# Altium PCB Probe-Scope v1.0.PcbDoc (part 1 of 2)
Units mil, origin at the board's own origin, x right, y up, seen from the top; angles counter-clockwise.
Board outline 2550 x 850 mil, 6 copper layers (Top Layer, Signal Layer 1, Signal Layer 2, Ground Plane, Power Layer, Bottom Layer), stack 48.468 mil thick; 135 components, 135 nets, 640 pads, 373 vias.
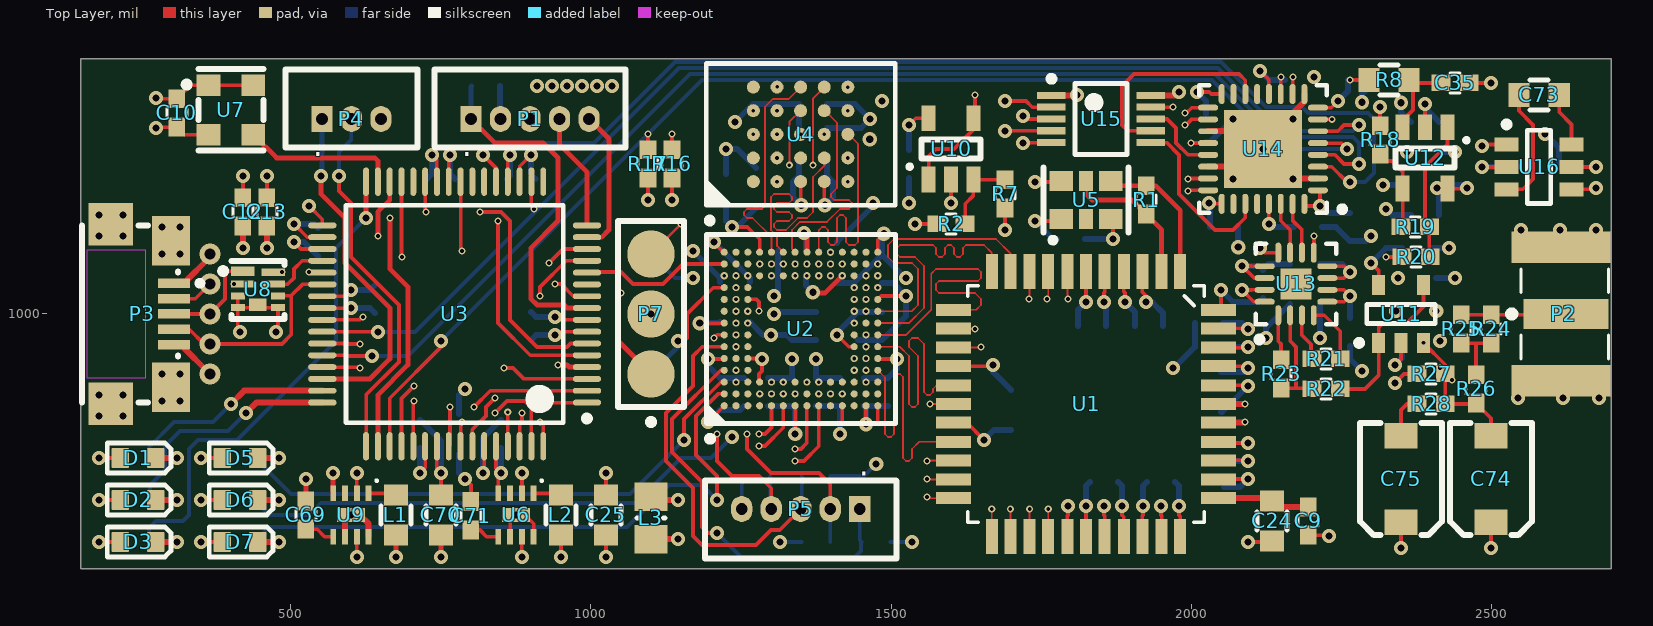
[diagram p0: Top Layer view]
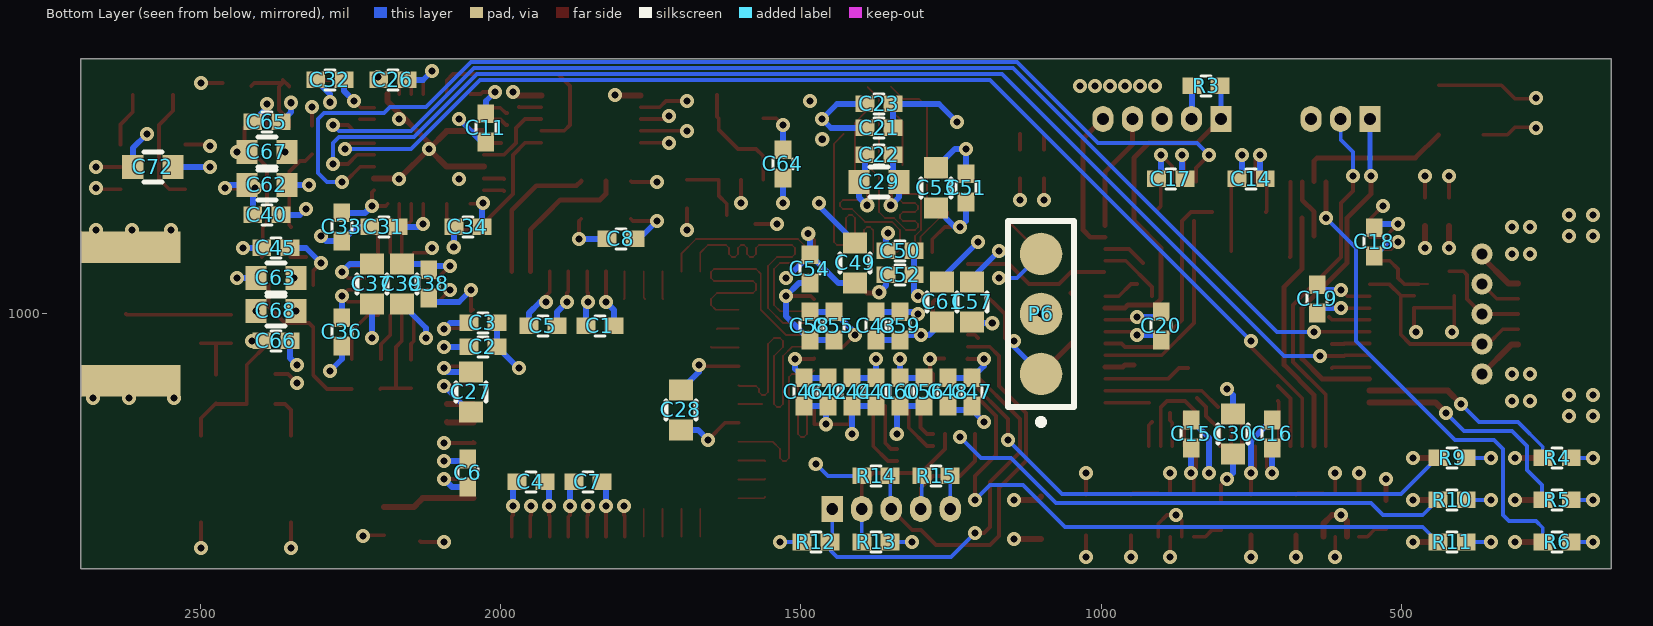
[diagram p1: Bottom Layer view, seen from below]
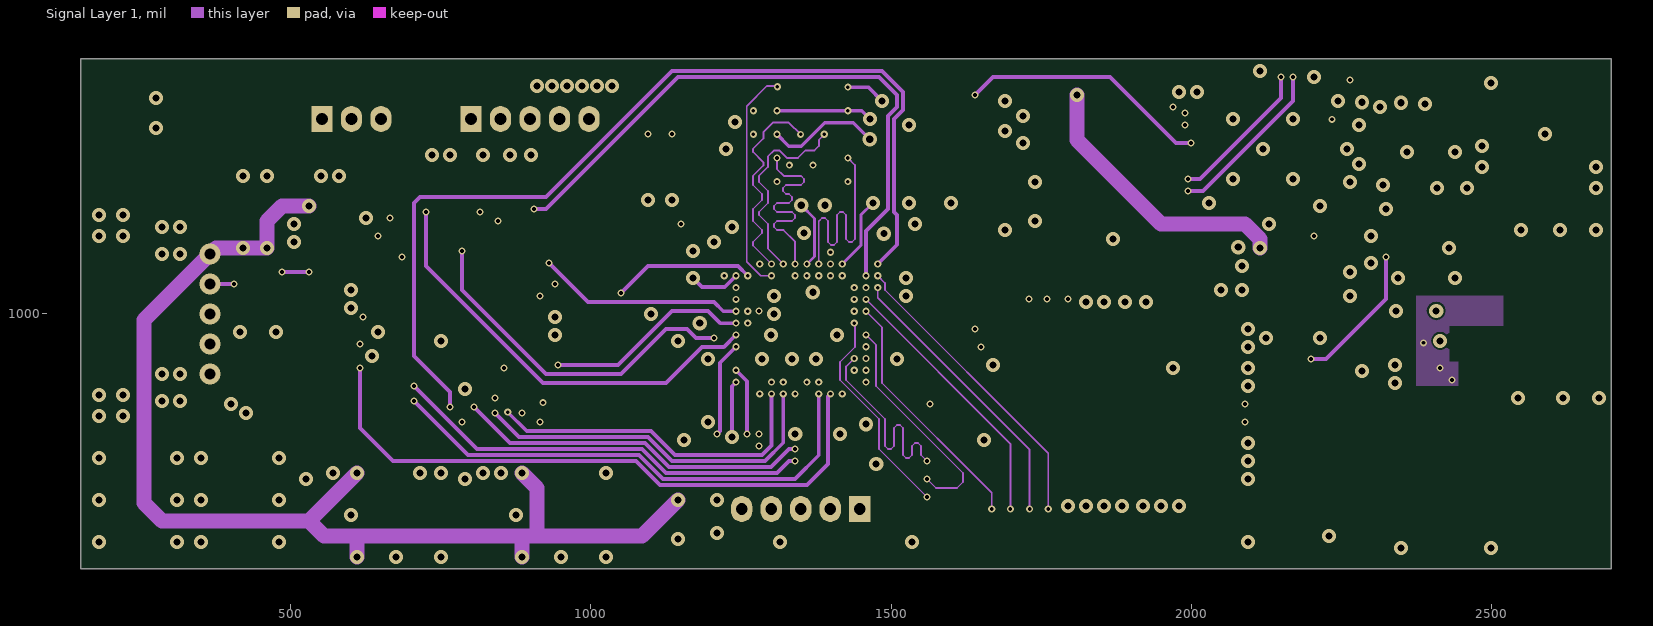
[diagram p2: Signal Layer 1]
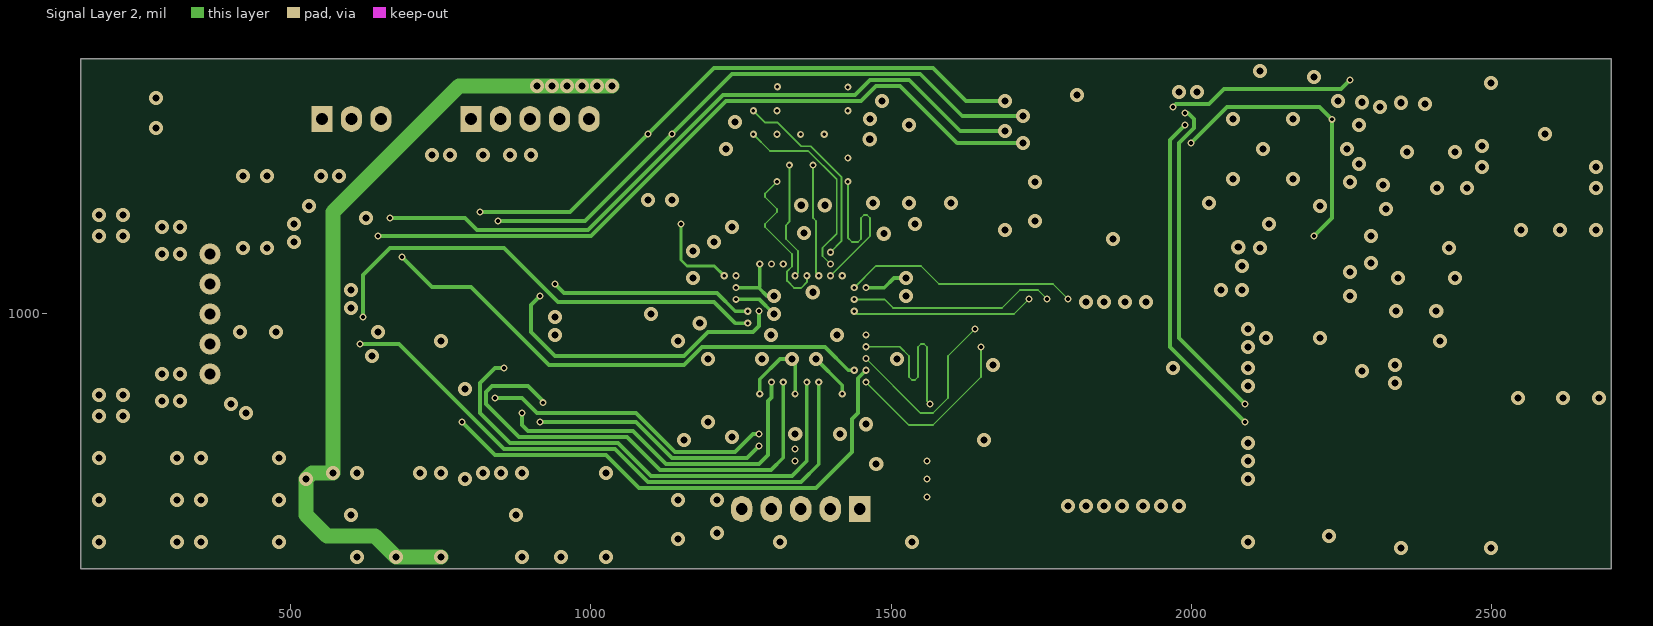
[diagram p3: Signal Layer 2]
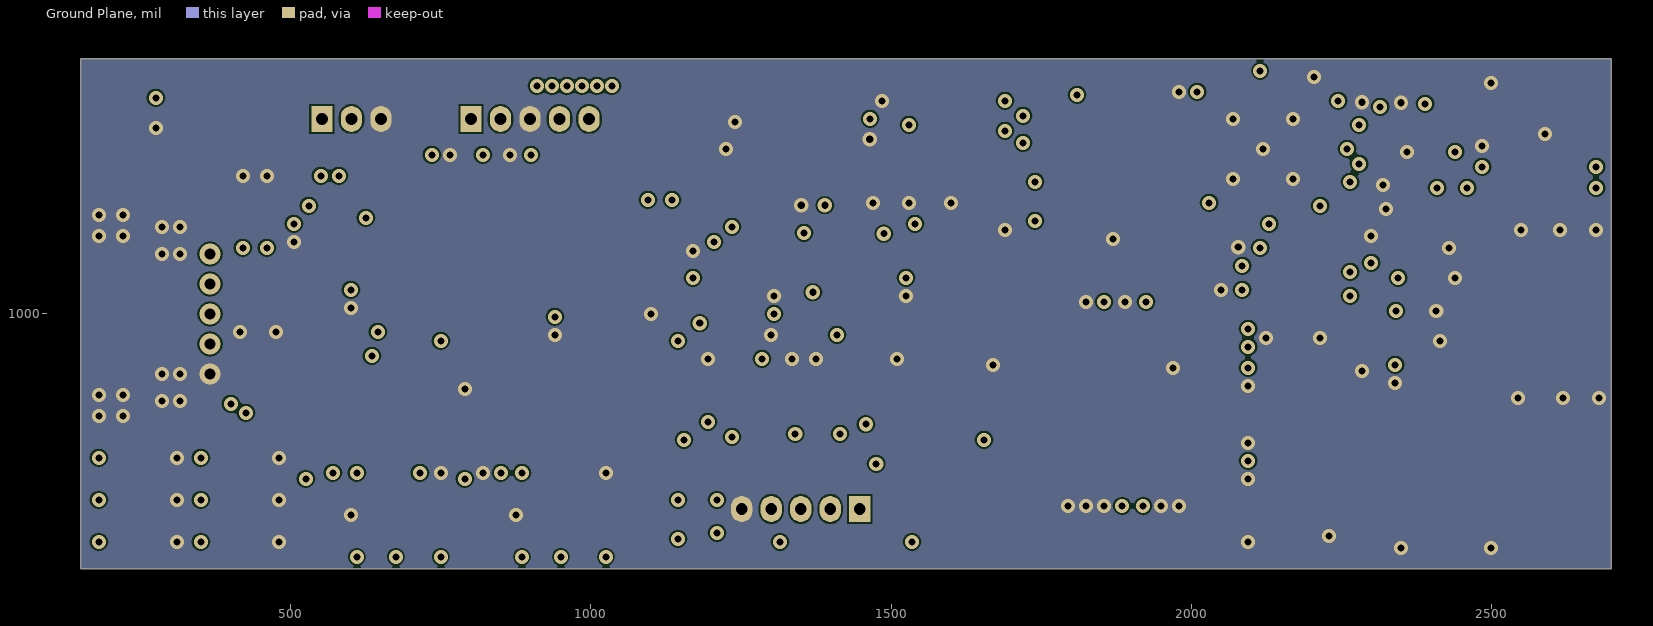
[diagram p4: Ground Plane]
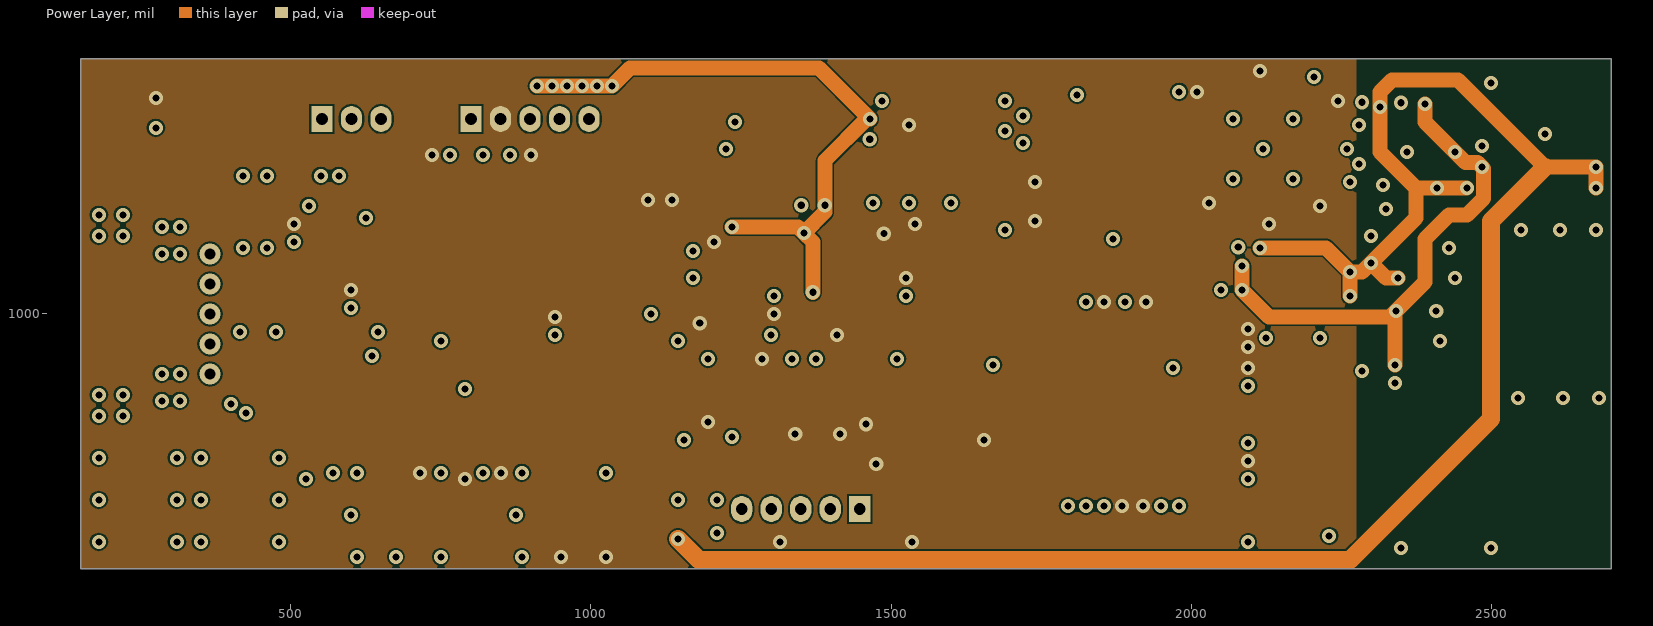
[diagram p5: Power Layer]

## Layer stack, top to bottom
Top Solder: solder mask 0.4, Solder Resist, Dk 3.5
Top Layer: signal copper 1.4
Dielectric 1: core 10, Dk 4.2
Signal Layer 1: signal copper 1.417
Dielectric 3: prepreg 5, FR-4, Dk 4.2
Signal Layer 2: signal copper 1.417
Dielectric 5: core 10, Dk 4.2
Ground Plane: signal copper 1.417
Dielectric 4: prepreg 5, Dk 4.2
Power Layer: signal copper 1.417
Dielectric 2: core 10, Dk 4.2
Bottom Layer: signal copper 1.4
Bottom Solder: solder mask 0.4, Solder Resist, Dk 3.5

## Board outline
150,575 2700,575 2700,1425 150,1425

## Design rules (kind name [scope] priority, off if disabled: settings)
Clearance BGAClearance [All vs HasFootprint('Cypress-VAA024')] p1: gap=3 ignorepadtopadclearanceinfootprint=FALSE
Clearance [All] p2: gap=3 ignorepadtopadclearanceinfootprint=FALSE
DiffPairsRouting [All] p1: maxlimit=10 minlimit=3 mostfreqgap=6 toplayer_minwidth=3 toplayer_maxwidth=15 toplayer_prefwidth=6 midlayer1_minwidth=3 midlayer1_maxwidth=15 midlayer1_prefwidth=6 midlayer2_minwidth=3 midlayer2_maxwidth=15 midlayer2_prefwidth=6 midlayer3_minwidth=3 midlayer3_maxwidth=15 midlayer3_prefwidth=6 midlayer4_minwidth=3 midlayer4_maxwidth=15 midlayer4_prefwidth=6 bottomlayer_minwidth=3 bottomlayer_maxwidth=15 bottomlayer_prefwidth=6 maxuncoupledlength=500
HoleSize [All] p1: absolutevalues=TRUE maxlimit=200 minlimit=6 maxpercent=80.000 minpercent=20.000
HoleToHoleClearance ViaToViaClearance [IsVia vs IsVia] p1: gap=6 allowstackedmicrovias=TRUE
HoleToHoleClearance [All] p2: gap=10 allowstackedmicrovias=TRUE
PlaneClearance [All] p1: clearance=6
PlaneConnect [All] p1: planeconnectstyle=Direct reliefexpansion=20 reliefentries=4 reliefconductorwidth=10 reliefairgap=10
PolygonConnect [All] p1: connectstyle=Direct reliefconductorwidth=10 reliefentries=4 polygonreliefangle="90 Angle" airgapwidth=10
RoutingVias [All] p1: holewidth=12 width=24 viastyle="Through Hole" minholewidth=6 minwidth=12 maxholewidth=28 maxwidth=50
SolderMaskExpansion [All] p1: expansion=4
Width [All] p1: maxlimit=50 minlimit=3 preferedwidth=6 toplayer_maxwidth=10 midlayer1_maxwidth=25 midlayer2_maxwidth=25 midlayer4_maxwidth=10 bottomlayer_maxwidth=10 minimp=50.000000 maximp=50.000000 favimp=50.000000
25 further rules are at their usual default settings.

## Classes and differential pairs
component class Power: C25 C41 C42 C43 C44 C46 C47 C48 C49 C50 C51 C52 C53 C54 C55 C56 C57 C58 C59 C60 C61 C69 C70 C71 C72 C73 L1 L2 L3 PAD1 PAD2 PAD3 PAD4 U6 U9 U16
component class "Sample Memory": C21 C22 C23 C29 U4
component class Controller: C10 C12 C13 C14 C15 C16 C17 C18 C19 C20 C30 D1 D2 D3 D5 D6 D7 P1 P3 P4 P5 P6 P7 P? R3 R4 R5 R6 R9 R10 R11 R12 R13 R14 R15 R16 R17 U3 U7 U8
component class "Analog Frontend": C11 C26 C31 C32 C33 C34 C35 C36 C37 C38 C39 C40 C45 C62 C63 C64 C65 C66 C67 C68 C74 C75 C? P2 P? R2 R7 R8 R18 R19 R20 R21 R22 R23 R24 R25 R26 R27 R28 R? TP? U10 U11 U12 U13 U14 U15 U? VCM?
component class ADC: C1 C2 C3 C4 C5 C6 C7 C8 C9 C24 C27 C28 R1 U1 U2 U5
net class "ADC_DATA - 150mil": ADC_D0A ADC_D0B ADC_D1A ADC_D1B ADC_D2A ADC_D2B ADC_D3A ADC_D3B ADC_D4A ADC_D4B ADC_D5A ADC_D5B ADC_D6A ADC_D6B ADC_D7A ADC_D7B ADC_DCO_N ADC_DCO_P
net class "ADC_CLK - 37.5mil": ADC_D1B ADC_DCO_N ADC_DCO_P
net class "ADC_OSC - 37.5mil": ADC_OSC_N ADC_OSC_P
net class "MEMDDR - 150mil": MEM_C\S\ MEM_CK_N MEM_CK_P MEM_D0 MEM_D1 MEM_D2 MEM_D3 MEM_D4 MEM_D5 MEM_D6 MEM_D7 MEM_PSC_N MEM_PSC_P MEM_R\E\S\E\T\ MEM_RWDS
differential pair Vin: +Vin_P -Vin_N
differential pair FDIO1: +FDIO1_P -FDIO1_N
differential pair FDIO0: +FDIO0_P -FDIO0_N
differential pair ADC_DCO: +ADC_DCO_P -ADC_DCO_N
differential pair ADC_OSC: +ADC_OSC_P -ADC_OSC_N

## Components (designator, comment, footprint, x,y, rotation, side; value= is the part's Value field where it differs from the comment)
C1 "6.3V" 0402(1005) 1835,980 r0 bottom value=0.1uF
C2 "6.3V" 0402(1005) 2030,945 r0 bottom value=0.1uF
C3 "6.3V" 0402(1005) 2030,985 r0 bottom value=0.1uF
C4 "6.3V" 0402(1005) 1950,720 r180 bottom value=0.1uF
C5 "6.3V" 0402(1005) 1930,980 r0 bottom value=0.1uF
C6 "6.3V" 0402(1005) 2055,735 r90 bottom value=0.1uF
C7 "6.3V" 0402(1005) 1855,720 r0 bottom value=0.1uF
C8 "6.3V" 0402(1005) 1800,1125 r180 bottom value=0.1uF
C9 "6.3V" 0402(1005) 2195,655 r90 top value=0.1uF
C10 "6.3V" 0402(1005) 310,1335 r90 top value=0.1uF
C11 "6.3V" 0402(1005) 2025,1310 r90 bottom value=0.1uF
C12 "10V" 0402(1005) 420,1170 r270 top value=1uF
C13 "6.3V" 0402(1005) 460,1170 r270 top value=0.1uF
C14 "6.3V" 0402(1005) 750,1225 r180 bottom value=0.1uF
C15 "6.3V" 0402(1005) 850,800 r270 bottom value=0.1uF
C16 "6.3V" 0402(1005) 715,800 r270 bottom value=0.1uF
C17 "6.3V" 0402(1005) 883.62,1225 r0 bottom value=0.1uF
C18 "6.3V" 0402(1005) 545,1120 r90 bottom value=0.1uF
C19 "6.3V" 0402(1005) 640,1025 r90 bottom value=0.1uF
C20 "6.3V" 0402(1005) 900,980 r90 bottom value=0.1uF
C21 "6.3V" 0402(1005) 1370,1310 r0 bottom value=0.1uF
C22 "6.3V" 0402(1005) 1370,1265 r0 bottom value=0.1uF
C23 "6.3V" 0402(1005) 1370,1350 r0 bottom value=0.1uF
C24 "25V" 0603(1608) 2135,655 r90 top value=10uF
C25 "25V" 0603(1608) 1025,665 r270 top value=10uF
C26 "6.3V" 0402(1005) 2180,1390 r180 bottom value=0.1uF
C27 "25V" 0603(1608) 2050,870 r90 bottom value=10uF
C28 "25V" 0603(1608) 1700,840 r270 bottom value=10uF
C29 "25V" 0603(1608) 1370,1220 r0 bottom value=10uF
C30 "25V" 0603(1608) 780,800 r270 bottom value=10uF
C31 "6.3V" 0402(1005) 2195,1145 r180 bottom value=0.1uF
C32 "6.3V" 0402(1005) 2285,1390 r180 bottom value=0.1uF
C33 "6.3V" 0402(1005) 2265,1145 r90 bottom value=0.1uF
C34 "6.3V" 0402(1005) 2055,1145 r180 bottom value=0.1uF
C35 "6.3V" 0402(1005) 2440,1385 r180 top value=0.1uF
C36 "6.3V" 0402(1005) 2265,970 r90 bottom value=0.1uF
C37 "25V" 0603(1608) 2215,1050 r90 bottom value=10uF
C38 "6.3V" 0402(1005) 2120,1050 r90 bottom value=0.1uF
C39 "25V" 0603(1608) 2165,1050 r90 bottom value=10uF
C40 "6.3V" 0402(1005) 2390,1165 r0 bottom value=0.1uF
C41 "6.3V" 0402(1005) 1375,870 r270 bottom value=0.1uF
C42 "6.3V" 0402(1005) 1455,870 r270 bottom value=0.1uF
C43 "6.3V" 0402(1005) 1375,980 r90 bottom value=0.1uF
C44 "6.3V" 0402(1005) 1415,870 r270 bottom value=0.1uF
C45 "6.3V" 0402(1005) 2375,1110 r180 bottom value=0.1uF
C46 "6.3V" 0402(1005) 1495,870 r270 bottom value=0.1uF
C47 "6.3V" 0402(1005) 1215,870 r270 bottom value=0.1uF
C48 "6.3V" 0402(1005) 1255,870 r270 bottom value=0.1uF
C49 "25V" 0603(1608) 1410,1085 r270 bottom value=10uF
C50 "6.3V" 0402(1005) 1335,1105 r0 bottom value=0.1uF
C51 "6.3V" 0402(1005) 1225,1210 r270 bottom value=0.1uF
C52 "6.3V" 0402(1005) 1335,1065 r0 bottom value=0.1uF
C53 "25V" 0603(1608) 1275,1210 r270 bottom value=10uF
C54 "6.3V" 0402(1005) 1485,1075 r90 bottom value=0.1uF
C55 "6.3V" 0402(1005) 1445,980 r90 bottom value=0.1uF
C56 "6.3V" 0402(1005) 1295,870 r270 bottom value=0.1uF
C57 "25V" 0603(1608) 1215,1020 r270 bottom value=10uF
C58 "6.3V" 0402(1005) 1485,980 r90 bottom value=0.1uF
C59 "6.3V" 0402(1005) 1335,980 r90 bottom value=0.1uF
C60 "6.3V" 0402(1005) 1335,870 r270 bottom value=0.1uF
C61 "25V" 0603(1608) 1265,1020 r90 bottom value=10uF
C62 "25V" 0603(1608) 2390,1215 r0 bottom value=10uF
C63 "25V" 0603(1608) 2375,1060 r180 bottom value=10uF
C64 "6.3V" 0402(1005) 1530,1250 r90 bottom value=0.1uF
C65 "6.3V" 0402(1005) 2390,1320 r0 bottom value=0.1uF
C66 "6.3V" 0402(1005) 2375,955 r180 bottom value=0.1uF
C67 "25V" 0603(1608) 2390,1270 r0 bottom value=10uF
C68 "25V" 0603(1608) 2375,1005 r180 bottom value=10uF
C69 "Cap" 0402(1005) 525,665 r90 top value=560p
C70 "25V" 0603(1608) 750,665 r270 top value=10uF
C71 "Cap" 0402(1005) 800,663.62 r90 top value=560p
C72 "25V" 0603(1608) 2580,1245 r180 bottom value=10uF
C73 "25V" 0603(1608) 2580,1365 r0 top value=10uF
C74 "SGC3S" SGC3S 2500,725 r180 top
C75 "SGC3S" SGC3S 2350,725 r180 top
D1 "Green" "0603(1608) LED" 245,760 r0 top
D2 "Green" "0603(1608) LED" 245,690 r0 top
D3 "Green" "0603(1608) LED" 245,620 r0 top
D5 "Green" "0603(1608) LED" 415,760 r0 top
D6 "Green" "0603(1608) LED" 415,690 r0 top
D7 "Green" "0603(1608) LED" 415,620 r0 top
L1 "Inductor" 0603(1608) 675,665 r270 top value=1u
L2 "Inductor" 0603(1608) 950,665 r270 top value=1u
L3 "Ferrite Bead Y" 0805(2012) 1100,660 r270 top
P1 "ICSP" "MOLEX PICOBLADE 5 POS" 923.03,1325 r180 top
P2 "SMA-J-P-H-ST-EM1" *SMA-J-P-H-ST-EM1_SMA-J-P-H-ST-EM1(Primary) 2625,1000 r90 top
P3 "Micro USB" "USB Micro B ZX62" 305,1000 r270 top
P4 "PicoBlade 3" "MOLEX PICOBLADE 3 POS" 600.79,1325 r180 top
P5 "PicoBlade 5" "MOLEX PICOBLADE 5 POS" 1325,675 r0 top
P6 "Pogo Pads" POGO_PADS_3 1100,1000 r90 bottom
P7 "Pogo Pins" POGO_PINS_3 1100,1000 r90 top
R1 "Res1" 0402(1005) 1925,1190 r270 top value=100
R2 "0.1% 25ppm" 0402(1005) 1600,1150 r180 top value=10k
R3 "0.1% 25ppm" 0402(1005) 825,1380 r0 bottom value=10k
R4 "Res1" 0402(1005) 240,760 r180 bottom value=100
R5 "Res1" 0402(1005) 240,690 r180 bottom value=100
R6 "Res1" 0402(1005) 240,620 r180 bottom value=100
R7 "0.1% 25ppm" 0402(1005) 1690,1200 r90 top value=10k
R8 "Res1" 0603(1608) 2330,1390 r0 top value=16.9k
R9 "Res1" 0402(1005) 415,760 r0 bottom value=100
R10 "Res1" 0402(1005) 415,690 r0 bottom value=100
R11 "Res1" 0402(1005) 415,620 r0 bottom value=100
R12 "Res1" 0402(1005) 1475,620 r0 bottom value=4.99k
R13 "Res1" 0402(1005) 1375,620 r180 bottom value=4.99k
R14 "Res1" 0402(1005) 1375,730 r0 bottom value=4.99k
R15 "Res1" 0402(1005) 1275,730 r0 bottom value=4.99k
R16 "Res1" 0402(1005) 1135,1250 r270 top value=2.32k
R17 "Res1" 0402(1005) 1095,1250 r270 top value=2.32k
R18 "1k" 0402(1005) 2315,1290 r270 top
R19 "1k" 0402(1005) 2373.62,1145 r0 top
R20 "1k" 0402(1005) 2375,1095 r180 top
R21 "1k" 0402(1005) 2225,925 r0 top
R22 "1k" 0402(1005) 2225,875 r180 top
R23 "1k" 0402(1005) 2150,900 r90 top
R24 "Res1" 0402(1005) 2500,975 r90 top value=10M
R25 "Res1" 0402(1005) 2450,975 r90 top value=680k
R26 "Res1" 0402(1005) 2475,875 r90 top value=330k
R27 "Res1" 0402(1005) 2400,900 r0 top value=28k
R28 "Res1" 0402(1005) 2400,850 r0 top value=28k
U1 "AD9481BSUZ-250" QFP80P1200X1200X120-44N 1825,850 r270 top locked
U2 "LCMXO2-4000" 132_Ball_csBGA_MachXO2 1350,975 r90 top locked
U3 "PIC32MZ2048EFH064" TSQFP50P1200X1200X120-64L 772.8,1000 r180 top locked
U4 "S70KS128" Cypress-VAA024 1349.37,1299.37 r90 top locked
U5 "DSC1103" MCHP_H5A 1825,1190 r0 top
U6 "MIC23050_3V" MCP_8_MLF 875,665 r270 top
U7 "24MHz XO" DSC60xxC 400,1340 r0 top
U8 "EMI2121" EMI2121 445,1040 r270 top
U9 "MIC23050_1V8" MCP_8_MLF 600,665 r270 top
U10 "MCP6H01" SOT23-5 1600,1275 r90 top
U11 "AD8055" SOT95P280X145-5L 2350,1000 r90 top
U12 "MCP6H01" SOT23-5 2390,1260 r270 top
U13 "ADA4932-1" QFN50P300X300X80_HS-17L 2175,1050 r90 top
U14 "ADRF6518" QFN50P500X500X80_HS-33L 2120,1275 r180 top
U15 "MCP4728" MSOP-10 1850,1325 r0 top
U16 "LM2664" SOT95P280X145-6N 2580,1245 r0 top

## Footprints (in the part's own frame and the unit in brackets; to place one, negate y for a bottom-side part, rotate by r counter-clockwise, add the part's x,y. Pads: shape width x height; smd on the part's side, far side on the other; paste and mask are expansions set on the pad)
132_Ball_csBGA_MachXO2 [mm] "BGA, 132-Leads, Body 8.00x8.00mmx1.35mm, Pitch 0.50mm"
  round 0.3 smd mask-0.025: A1(-3.25,3.25) A2(-2.75,3.25) A3(-2.25,3.25) A4(-1.75,3.25) A5(-1.25,3.25) A6(-0.75,3.25) A7(-0.25,3.25) A8(0.25,3.25) A9(0.75,3.25) A10(1.25,3.25) A11(1.75,3.25) A12(2.25,3.25) A13(2.75,3.25) A14(3.25,3.25) B1(-3.25,2.75) B2(-2.75,2.75) B3(-2.25,2.75) B4(-1.75,2.75) B5(-1.25,2.75) B6(-0.75,2.75) B7(-0.25,2.75) B8(0.25,2.75) B9(0.75,2.75) B10(1.25,2.75) B11(1.75,2.75) B12(2.25,2.75) B13(2.75,2.75) B14(3.25,2.75) C1(-3.25,2.25) C2(-2.75,2.25) C3(-2.25,2.25) C4(-1.75,2.25) C5(-1.25,2.25) C6(-0.75,2.25) C7(-0.25,2.25) C8(0.25,2.25) C9(0.75,2.25) C10(1.25,2.25) C11(1.75,2.25) C12(2.25,2.25) C13(2.75,2.25) C14(3.25,2.25) D1(-3.25,1.75) D2(-2.75,1.75) D3(-2.25,1.75) D12(2.25,1.75) D13(2.75,1.75) D14(3.25,1.75) E1(-3.25,1.25) E2(-2.75,1.25) E3(-2.25,1.25) E12(2.25,1.25) E13(2.75,1.25) E14(3.25,1.25) F1(-3.25,0.75) F2(-2.75,0.75) F3(-2.25,0.75) F12(2.25,0.75) F13(2.75,0.75) F14(3.25,0.75) G1(-3.25,0.25) G2(-2.75,0.25) G3(-2.25,0.25) G12(2.25,0.25) G13(2.75,0.25) G14(3.25,0.25) H1(-3.25,-0.25) H2(-2.75,-0.25) H3(-2.25,-0.25) H12(2.25,-0.25) H13(2.75,-0.25) H14(3.25,-0.25) J1(-3.25,-0.75) J2(-2.75,-0.75) J3(-2.25,-0.75) J12(2.25,-0.75) J13(2.75,-0.75) J14(3.25,-0.75) K1(-3.25,-1.25) K2(-2.75,-1.25) K3(-2.25,-1.25) K12(2.25,-1.25) K13(2.75,-1.25) K14(3.25,-1.25) L1(-3.25,-1.75) L2(-2.75,-1.75) L3(-2.25,-1.75) L12(2.25,-1.75) L13(2.75,-1.75) L14(3.25,-1.75) M1(-3.25,-2.25) M2(-2.75,-2.25) M3(-2.25,-2.25) M4(-1.75,-2.25) M5(-1.25,-2.25) M6(-0.75,-2.25) M7(-0.25,-2.25) M8(0.25,-2.25) M9(0.75,-2.25) M10(1.25,-2.25) M11(1.75,-2.25) M12(2.25,-2.25) M13(2.75,-2.25) M14(3.25,-2.25) N1(-3.25,-2.75) N2(-2.75,-2.75) N3(-2.25,-2.75) N4(-1.75,-2.75) N5(-1.25,-2.75) N6(-0.75,-2.75) N7(-0.25,-2.75) N8(0.25,-2.75) N9(0.75,-2.75) N10(1.25,-2.75) N11(1.75,-2.75) N12(2.25,-2.75) N13(2.75,-2.75) N14(3.25,-2.75) P1(-3.25,-3.25) P2(-2.75,-3.25) P3(-2.25,-3.25) P4(-1.75,-3.25) P5(-1.25,-3.25) P6(-0.75,-3.25) P7(-0.25,-3.25) P8(0.25,-3.25) P9(0.75,-3.25) P10(1.25,-3.25) P11(1.75,-3.25) P12(2.25,-3.25) P13(2.75,-3.25) P14(3.25,-3.25)
  silkscreen extent -4.77,-4 4,4, body extent -4,-4 4,4, height 1.35
0402(1005) [mm] "Chip, Body 1.1x0.5mm, IPC Medium Density"
  rect 0.8x0.7 smd: 1(-0.6,0) 2(0.6,0)
  silkscreen extent -0.2,-0.43 0.2,0.43, body extent -0.55,-0.3 0.55,0.3, height 0.4
0603(1608) [mm] "Chip, Body 1.6x0.8mm, IPC Medium Density"
  rect 0.9x1 smd: 1(-0.85,0) 2(0.85,0)
  silkscreen extent -0.38,-0.64 0.38,0.63, body extent -0.85,-0.48 0.85,0.47, height 0.6
"0603(1608) LED" [mm] "0603 LED"
  rrect15% 0.75x0.85 smd: 1(-0.75,0) 2(0.75,0)
  silkscreen extent -1.3,-0.64 1.4,0.64, body extent -0.8,-0.4 0.8,0.4, height 0.5
0805(2012) [mm] "Chip, Body 2.0x1.3mm, IPC Medium Density"
  rect 1.2x1.4 smd: 1(-0.9,0) 2(0.9,0)
  silkscreen extent 0,-0.6 0,0.6, body extent -1.02,-0.64 1.02,0.64, height 0.51
*SMA-J-P-H-ST-EM1_SMA-J-P-H-ST-EM1(Primary) [mm]
  rect 1.27x3.6 smd: 1(0,0)
  rect 1.35x4.2 smd: 2(-2.825,0.2) 2(2.825,0.2)
  rect 1.35x4.2 smd far side: 2(-2.825,0.2) 2(2.825,0.2)
  silkscreen extent -1.9,-1.8 1.9,2.44, body extent -3.2,-11.44 3.15,1.89, height 3.77
Cypress-VAA024 [mm]
  round 0.55 smd mask-0.1: A1(-2,2) A2(-1,2) A3(0,2) A4(1,2) A5(2,2) B1(-2,1) B2(-1,1) B3(0,1) B4(1,1) B5(2,1) C1(-2,0) C2(-1,0) C3(0,0) C4(1,0) C5(2,0) D1(-2,-1) D2(-1,-1) D3(0,-1) D4(1,-1) D5(2,-1) E1(-2,-2) E2(-1,-2) E3(0,-2) E4(1,-2) E5(2,-2)
  silkscreen extent -3.77,-4 3,4, body extent -3,-4 3,4, height 1
DSC60xxC [mm] "Microchip DSC60xxCxxx-xxx.xxxx MEMS Oscillator, DFN-4"
  rect 1x0.9 smd: 1(-0.95,1.05) 2(-0.95,-1.05) 3(0.95,-1.05) 4(0.95,1.05)
  silkscreen extent -2,-1.73 1.38,1.73, body extent -1.25,-1.6 1.25,1.6, height 0.85
EMI2121 [mm] "ON Semi EMI2121 USB EMI Filter"
  rect 0.54x0.742 smd mask+0.075: 0(0.63,0)
  rect 0.4x1 smd mask+0.08: 1(-0.8,-0.65)
  rect 0.3x1 smd mask+0.08: 2(-0.25,-0.65) 7(-0.25,0.65) 8(-0.75,0.65)
  rect 0.3x0.6 smd mask+0.075: 3(0.25,-0.85) 4(0.75,-0.85) 5(0.75,0.85) 6(0.25,0.85)
  silkscreen extent -1.23,-1.6 1.23,1.13, body extent -1.1,-1 1.1,1, height 0.75
MCHP_H5A [mm] "6-VDFN, 3.2x2.5mm (Microchip Case H5A)"
  rect 1x0.85 smd mask+0.09: 1(-1.05,-0.8) 3(1.05,-0.8) 4(1.05,0.8) 6(-1.05,0.8)
  rect 0.6x0.85 smd mask+0.09: 2(0,-0.8) 5(0,0.8)
  silkscreen extent -1.8,-1.8 1.8,1.38, body extent -1.6,-1.25 1.6,1.25, height 0.85
MCP_8_MLF [mm] "MCP_8_MLF"
  rect 0.65x0.25 smd: 1(-0.915,0.75) 2(-0.915,0.25) 3(-0.915,-0.25) 4(-0.915,-0.75) 5(0.915,-0.75) 6(0.915,-0.25) 7(0.915,0.25) 8(0.915,0.75)
  rect 0.6x1.2 smd: 9(0,0)
  silkscreen extent -1.5,1.04 -1.4,1.14, body extent -1,-1 1,1, height 0.9
"MOLEX PICOBLADE 3 POS" [mm] "Molex Picoblade 3 pos, 1.25mm pitch, PN 53047-0310"
  rect 0.9x1.1 hole 0.5: 1(1.25,0)
  oval 0.9x1.1 hole 0.5: 2(0,0) 3(-1.25,0)
  silkscreen extent -2.8,-2.1 2.8,1.2, body extent -2.75,-2.05 2.75,1.15, height 4.2
"MOLEX PICOBLADE 5 POS" [mm] "Molex Picoblade 5 pos, 1.25mm pitch, PN 53047-0510"
  rect 0.9x1.1 hole 0.5: 1(3.125,0)
  oval 0.9x1.1 hole 0.5: 2(1.875,0) 3(0.625,0) 4(-0.625,0) 5(-1.875,0)
  silkscreen extent -3.42,-2.1 4.67,1.2, body extent -3.3,-2.05 4.62,1.2, height 4.2
MSOP-10 [mm]
  rect 1.2x0.3 smd: 1(-2.1,1) 2(-2.1,0.5) 3(-2.1,0) 4(-2.1,-0.5) 5(-2.1,-1) 6(2.1,-1) 7(2.1,-0.5) 8(2.1,0) 9(2.1,0.5) 10(2.1,1)
  silkscreen extent -2.22,-1.5 1.1,1.82, body extent -2.45,-1.5 2.45,1.5, height 1.1
POGO_PADS_3 [mm] "Pogo Pads, 1.8mm Pads, 100mil Pitch, 3 Pos"
  round 1.8 smd: 1(-2.54,0) 2(0,0) 3(2.54,0)
  silkscreen extent -4.7,-1.4 3.94,1.4
POGO_PINS_3 [mm] "Pogo Pins, 2mm Pads, 100mil Pitch, 3 Pos"
  round 2 smd: 1(-2.54,0) 2(0,0) 3(2.54,0)
  silkscreen extent -4.7,-1.4 3.94,1.4, body extent -3.81,-1.27 3.81,1.27, height 5
QFN50P300X300X80_HS-17L [mm] "QFN, 16-Leads, Body 3.00x3.00mm, Pitch 0.50mm, Thermal Pad 1.30x1.30mm, IPC High Density"
  oval 0.85x0.25 smd: 1(-1.325,0.75) 2(-1.325,0.25) 3(-1.325,-0.25) 4(-1.325,-0.75) 9(1.325,-0.75) 10(1.325,-0.25) 11(1.325,0.25) 12(1.325,0.75)
  oval 0.25x0.85 smd: 5(-0.75,-1.325) 6(-0.25,-1.325) 7(0.25,-1.325) 8(0.75,-1.325) 13(0.75,1.325) 14(0.25,1.325) 15(-0.25,1.325) 16(-0.75,1.325)
  rect 1.3x1.3 smd: 17(0,0)
  silkscreen extent -2.47,-1.7 1.7,1.7, body extent -1.57,-1.57 1.57,1.57, height 0.8
QFN50P500X500X80_HS-33L [mm] "QFN, 32-Leads, Body 5.00x5.00mm, Pitch 0.50mm, Thermal Pad 3.30x3.30mm, IPC High Density"
  oval 0.85x0.25 smd: 1(-2.325,1.75) 2(-2.325,1.25) 3(-2.325,0.75) 4(-2.325,0.25) 5(-2.325,-0.25) 6(-2.325,-0.75) 7(-2.325,-1.25) 8(-2.325,-1.75) 17(2.325,-1.75) 18(2.325,-1.25) 19(2.325,-0.75) 20(2.325,-0.25) 21(2.325,0.25) 22(2.325,0.75) 23(2.325,1.25) 24(2.325,1.75)
  oval 0.25x0.85 smd: 9(-1.75,-2.325) 10(-1.25,-2.325) 11(-0.75,-2.325) 12(-0.25,-2.325) 13(0.25,-2.325) 14(0.75,-2.325) 15(1.25,-2.325) 16(1.75,-2.325) 25(1.75,2.325) 26(1.25,2.325) 27(0.75,2.325) 28(0.25,2.325) 29(-0.25,2.325) 30(-0.75,2.325) 31(-1.25,2.325) 32(-1.75,2.325)
  rect 3.3x3.3 smd: 33(0,0)
  silkscreen extent -3.47,-2.7 2.7,2.7, body extent -2.55,-2.55 2.55,2.55, height 0.8
QFP80P1200X1200X120-44N [mil]
  rect 58x20 smd: 1(-221,157) 2(-221,126) 3(-221,94) 4(-221,63) 5(-221,31) 6(-221,0) 7(-221,-31) 8(-221,-63) 9(-221,-94) 10(-221,-126) 11(-221,-157) 23(221,-157) 24(221,-126) 25(221,-94) 26(221,-63) 27(221,-31) 28(221,0) 29(221,31) 30(221,63) 31(221,94) 32(221,126) 33(221,157)
  rect 20x58 smd: 12(-157,-221) 13(-126,-221) 14(-94,-221) 15(-63,-221) 16(-31,-221) 17(0,-221) 18(31,-221) 19(63,-221) 20(94,-221) 21(126,-221) 22(157,-221) 34(157,221) 35(126,221) 36(94,221) 37(63,221) 38(31,221) 39(0,221) 40(-31,221) 41(-63,221) 42(-94,221) 43(-126,221) 44(-157,221)
  silkscreen extent -197,-197 197,197, body extent -197,-197 197,197, height 20
SGC3S [mm] "Sprague-Goodman SGC3S Series Trimmer Cap"
  rect 1.4x1.075 smd: 1(0,1.837) 2(0,-1.837)
  silkscreen extent -1.73,-2.38 1.73,2.38, body extent -1.6,-2.25 1.6,2.25, height 1.5
SOT23-5 [mm] "SOT23-5"
  rect 1.1x0.6 smd: 1(-1.3,0.95) 2(-1.3,0) 3(-1.3,-0.95) 4(1.3,-0.95) 5(1.3,0.95)
  silkscreen extent -0.8,-1.25 0.4,1.8, body extent -0.6,-1.15 0.6,1.25, height 0.95
SOT95P280X145-5L [mm] "SOT23, 5-Leads, Body 2.90x2.80mm, Pitch 0.95mm, IPC High Density"
  rect 0.85x0.55 smd: 1(-1.225,0.95) 2(-1.225,0) 3(-1.225,-0.95) 4(1.225,-0.95) 5(1.225,0.95)
  silkscreen extent -1.35,-1.45 0.4,1.9, body extent -1.4,-1.45 1.4,1.45, height 1.45
SOT95P280X145-6N [mm] "SOT23, 6-Leads, Body 2.90x2.80mm, Pitch 0.95mm, IPC Medium Density"
  rect 1x0.6 smd: 1(-1.375,0.95) 2(-1.375,0) 3(-1.375,-0.95) 4(1.375,-0.95) 5(1.375,0) 6(1.375,0.95)
  silkscreen extent -1.5,-1.55 0.5,1.92, body extent -0.88,-1.52 0.87,1.53, height 1.45
TSQFP50P1200X1200X120-64L [mm] "TSQFP, 64-Leads, Body 10.00x10.00mm, Pitch 0.50mm, IPC High Density"
  oval 1.2x0.25 smd: 1(-5.6,3.75) 2(-5.6,3.25) 3(-5.6,2.75) 4(-5.6,2.25) 5(-5.6,1.75) 6(-5.6,1.25) 7(-5.6,0.75) 8(-5.6,0.25) 9(-5.6,-0.25) 10(-5.6,-0.75) 11(-5.6,-1.25) 12(-5.6,-1.75) 13(-5.6,-2.25) 14(-5.6,-2.75) 15(-5.6,-3.25) 16(-5.6,-3.75) 33(5.6,-3.75) 34(5.6,-3.25) 35(5.6,-2.75) 36(5.6,-2.25) 37(5.6,-1.75) 38(5.6,-1.25) 39(5.6,-0.75) 40(5.6,-0.25) 41(5.6,0.25) 42(5.6,0.75) 43(5.6,1.25) 44(5.6,1.75) 45(5.6,2.25) 46(5.6,2.75) 47(5.6,3.25) 48(5.6,3.75)
  oval 0.25x1.2 smd: 17(-3.75,-5.6) 18(-3.25,-5.6) 19(-2.75,-5.6) 20(-2.25,-5.6) 21(-1.75,-5.6) 22(-1.25,-5.6) 23(-0.75,-5.6) 24(-0.25,-5.6) 25(0.25,-5.6) 26(0.75,-5.6) 27(1.25,-5.6) 28(1.75,-5.6) 29(2.25,-5.6) 30(2.75,-5.6) 31(3.25,-5.6) 32(3.75,-5.6) 49(3.75,5.6) 50(3.25,5.6) 51(2.75,5.6) 52(2.25,5.6) 53(1.75,5.6) 54(1.25,5.6) 55(0.75,5.6) 56(0.25,5.6) 57(-0.25,5.6) 58(-0.75,5.6) 59(-1.25,5.6) 60(-1.75,5.6) 61(-2.25,5.6) 62(-2.75,5.6) 63(-3.25,5.6) 64(-3.75,5.6)
  silkscreen extent -5.72,-4.6 4.6,4.6, body extent -6,-6 6,6, height 1.2
"USB Micro B ZX62" [mm] "USB Micro B, Hirsoe ZX62"
  rect 0.4x1.35 smd: 1(-1.3,0) 2(-0.65,0) 3(0,0) 4(0.65,0) 5(1.3,0)
  rect 1.8x1.9 smd: 6(-3.8,-2.675) 6(3.8,-2.675)
  rect 2.1x1.6 smd: 6(-3.1,-0.125) 6(3.1,-0.125)
  Top Layer keep-out region: -2.692,-3.7 2.692,-3.7 2.692,-1.2 -2.692,-1.2
  silkscreen extent -3.75,-3.9 3.75,1.2, body extent -3.98,-5.38 3.98,0.18, height 2.8

## Part data
C1 C2 C3 C4 C5 C6 C7 C8 C9 C10 C11 C13 C14 C15 C16 C17 C18 C19 C20 C21 C22 C23 C26 C31 C32 C33 C34 C35 C36 C38 C40 C41 C42 C43 C44 C45 C46 C47 C48 C50 C51 C52 C54 C55 C56 C58 C59 C60 C64 C65 C66: library part 1875, Max Temperature=125, Package=0402, Tolerance=10, Voltage=6.3, Approved=False, Class=Capacitor, Date Modified="11/6/2018 11:14:02 AM", Key=1875, MANF="Samsung Electro-Mechanics", MANF_PN=CL05B104KQ5NNNC, MENG_PN=???1875, Modified By=jrowley, Other=X7R, P&V Description="Capacitor, Ceramic, 0.1uF, 6.3V, 10% Tol, 125C, X7R, 0402, SMD", Parent Key=1875, SMD=True, Type=Ceramic, VENDOR=Digikey, VENDOR_PN=1276-1511-1-ND, Verified=False
C12: library part 1876, Max Temperature=125, Package=0402, Tolerance=10, Approved=False, Class=Capacitor, Date Modified="11/6/2018 11:19:13 AM", Key=1876, MANF="Murata Electronics", MANF_PN=GCM155C71A105KE38D, MENG_PN=???1876, Modified By=jrowley, Other=X7S, P&V Description="Capacitor, Ceramic, 1uF, 10V, 10% Tol, 125C, X7S, 0402, SMD", Parent Key=1876, SMD=True, Type=Ceramic, VENDOR=Digikey, VENDOR_PN=490-13409-1-ND, Verified=False, Voltage=10
C24 C25 C27 C28 C29 C30 C37 C39 C49 C53 C57 C61 C62 C63 C67 C68 C70 C72 C73: library part 1306, Max Temperature=85, Package=0603, Tolerance=20, Voltage=25, Approved=True, Class=Capacitor, Date Modified="3/3/2015 11:08:29 AM", Key=1306, MANF="Samsung Electro-Mechanics", MANF_PN=CL10A106MA8NRNC, MENG_PN=???1306, Modified By=sotterbacher, Other=X5R, P&V Description="Capacitor, Ceramic, 10uF, 25V, 20% Tol, 85C, X5R, 0603, SMD", Parent Key=1306, SMD=True, Type=Ceramic, VENDOR=Digikey, VENDOR_PN=1276-1869-1-ND, Verified=True
C69 C71: library part 2112, Package=0402, Tolerance=10, Voltage=50, Approved=False, Class=Capacitor, Date Modified="7/11/2019 9:37:04 PM", Key=2112, MANF="Samsung Electro-Mechanics", MANF_PN=CL05B561KB5NNNC, MENG_PN=???2112, Modified By=momo, P&V Description="Capacitor, Electrolytic, 560p, 50V, 10% Tol, 0402, SMD", Parent Key=2112, SMD=True, Type=Electrolytic, VENDOR=Digikey, VENDOR_PN=1276-1577-1-ND, Verified=False
C74 C75: library part VarCap
D1 D2 D3 D5 D6 D7: library part 798, Current=0.02, Package=0603, Voltage=1.7, Approved=True, Class=LED, Date Modified="11/4/2014 3:14:11 PM", Key=798, MANF=OSRAM, MANF_PN="LG L29K-F2J1-24", MENG_PN=???798, Modified By=pmarcus, Other="Green, 570nm, diffused", P&V Description="LED, 1.7V, 0.02A, Green, 570nm, diffused, 0603, SMD", Parent Key=798, SMD=True, VENDOR=Digikey, VENDOR_PN=475-1193-1-ND, Verified=True
L1 L2: library part 2111, Current=1.3, Package=0603, Tolerance=20, Approved=False, Class=Inductor, Date Modified="7/11/2019 9:33:48 PM", DCR=0.123, Key=2111, MANF="Taiyo Yuden", MANF_PN=MCKK1608T1R0MN, MENG_PN=???2111, Modified By=momo, P&V Description="Inductor, Shielded, 1u, 1.3A, 0.123 Ohms, 0603, SMD", Parent Key=2111, SMD=True, Type=Shielded, VENDOR=Digikey, VENDOR_PN=587-5973-1-ND, Verified=False
L3: library part 323, Current=0.8, Package=0805, Approved=True, Class=Inductor, Date Modified="8/6/2009 8:13:58 AM", Key=323, MANF=TDK, MANF_PN=MMZ2012Y121B, MENG_PN=IND00006, Modified By=pmarcus, Other="120 Ohm at 100MHz, Effective from 80MHz To 400MHz, Y Material", P&V Description="Inductor, Ferrite Bead, 0.8A, 120 Ohm at 100MHz, Effective from 80MHz To 400MHz, Y Material, 0805, SMD", Parent Key=323, SMD=True, Type="Ferrite Bead", VENDOR=Digikey, VENDOR_PN=445-2196-1-ND, Verified=True
P1 P5: library part 1316, Current=1, Voltage=125, Approved=True, Class=Connector, Date Modified="4/3/2015 6:22:35 PM", Key=1316, MANF=Molex, MANF_PN=53047-0510, MENG_PN=???1316, Modified By=pmarcus, Other="Vert, Through Hole, Locking, Tin", P&V Description="Connector, PicoBlade, 5 Positions, Male, 0.049\" Spacing, 1A, 125V, Vert, Through Hole, Locking, Tin", Parent Key=1316, Positions=5, Sex=Male, SMD=False, Spacing=0.049, Type=PicoBlade, VENDOR=Digikey, VENDOR_PN=WM1734-ND, Verified=True
P3: library part 1830, Current=1.8, Voltage=100, Approved=False, Class=Connector, Date Modified="8/31/2018 2:15:27 PM", Key=1830, MANF="Amphenol FCI", MANF_PN=10118192-0002LF, MENG_PN=???1830, Modified By=jrowley, Other="USB - micro B USB 2.0 Receptacle Connector 5 Position Surface Mount, Right Angle, Without Flange", P&V Description="Connector, USB, 5 Positions, Female, 0.026\" Spacing, 1.8A, 100V, USB - micro B USB 2.0 Receptacle Connector 5 Position Surface Mount, Right Angle, Without Flange, SMD", Parent Key=1830, Positions=5, Sex=Female, SMD=True, Spacing=0.026, Type=USB, VENDOR=Digikey, VENDOR_PN=609-5379-1-ND, Verified=False
P4: library part 1286, Current=1, Voltage=125, Approved=True, Class=Connector, Date Modified="2/19/2015 4:08:35 PM", Key=1286, MANF=Molex, MANF_PN=53047-0310, MENG_PN=???1286, Modified By=rlaity, Other="Vert, Through Hole, Locking, Tin", P&V Description="Connector, PicoBlade, 3 Positions, Male, 0.049\" Spacing, 1A, 125V, Vert, Through Hole, Locking, Tin", Parent Key=1286, Positions=3, Sex=Male, SMD=False, Spacing=0.049, Type=PicoBlade, VENDOR=Digikey, VENDOR_PN=WM1732-ND, Verified=True
P6: library part POGO_PADS_3
P7: library part POGO_PINS_3, MANF=Prec-Dip, MANF_PN=811-SS-003-30-002101, VENDOR=DigiKey, VENDOR_PN=1212-1561-ND
R1 R4 R5 R6 R9 R10 R11: library part 1823, Package=0402, Power=0.0625, Tolerance=1, Voltage=100, Approved=False, Class=Resistor, Date Modified="8/29/2018 2:46:23 AM", Expr1026=1823, Key=1823, MANF=Yageo, MANF_PN=RC0402FR-07100RL, MENG_PN=???1823, Modified By=jrowley, P&V Description="Resistor, Thick Film, 100 Ohms, 0.0625W, 1% Tol, 100V, 0402, SMD", Parent Key=1823, SMD=True, Type="Thick Film", VENDOR=Digikey, VENDOR_PN=311-100LRCT-ND, Verified=False
R2 R3 R7: library part 1806, Package=0402, Power=0.0625, Tolerance=1, Voltage=100, Approved=False, Class=Resistor, Date Modified="8/27/2018 6:34:02 PM", Expr1026=1806, Key=1806, MANF="Stackpole Electronics", MANF_PN=RMCF0402FT10K0, MENG_PN=???1806, Modified By=jrowley, P&V Description="Resistor, Thick Film, 10k Ohms, 0.0625W, 1% Tol, 100V, 0402, SMD", Parent Key=1806, SMD=True, Type="Thick Film", VENDOR=Digikey, VENDOR_PN=RMCF0402FT10K0CT-ND, Verified=False
R8: library part 1011, Package=0603, Power=0.1, Tolerance=1, Approved=True, Class=Resistor, Date Modified="8/12/2013 4:27:29 PM", Expr1026=1011, Key=1011, MANF=Panasonic, MANF_PN=ERJ-3EKF1692V, MENG_PN=???1011, Modified By=sotterbacher, P&V Description="Resistor, Thick Film, 16.9k Ohms, 0.1W, 1% Tol, 0603, SMD", Parent Key=1011, SMD=True, Type="Thick Film", VENDOR=Digikey, VENDOR_PN=P16.9KHCT-ND, Verified=True
R12 R13 R14 R15: library part 1871, Package=0402, Power=0.063, Tolerance=1, Approved=False, Class=Resistor, Date Modified="11/5/2018 1:44:43 PM", Expr1026=1871, Key=1871, MANF=Yageo, MANF_PN=RC0402FR-074K99L, MENG_PN=???1871, Modified By=khall, Other="RES SMD 4.99K OHM 1% 1/16W 0402", P&V Description="Resistor, Thick Film, 4.99k Ohms, 0.063W, 1% Tol, RES SMD 4.99K OHM 1% 1/16W 0402, 0402, SMD", Parent Key=1871, SMD=True, Type="Thick Film", VENDOR=Digikey, VENDOR_PN=311-4.99KLRCT-ND, Verified=False
R16 R17: library part 1892, Package=0402, Power=0.0625, Tolerance=1, Approved=False, Class=Resistor, Date Modified="12/12/2018 9:31:20 AM", Expr1026=1892, Key=1892, MANF="Stackpole Electronics", MANF_PN=RMCF0402FT2K32, MENG_PN=1892, Modified By=khall, Other="2.32 kOhms ±1% 0.063W, 1/16W Chip Resistor 0402 (1005 Metric) Automotive AEC-Q200 Thick Film", P&V Description="Resistor, Thick Film, 2.32k Ohms, 0.0625W, 1% Tol, 2.32 kOhms ±1% 0.063W, 1/16W Chip Resistor 0402 (1005 Metric) Automotive AEC-Q200 Thick Film, 0402, SMD", Parent Key=1892, SMD=True, Type="Thick Film", VENDOR=Digikey, VENDOR_PN=RMCF0402FT2K32CT-ND, Verified=False
R18 R19 R20 R21 R22 R23: library part 1982, Package=0402, Power=0.063, Tolerance=1, Approved=False, Class=Resistor, Date Modified="3/25/2019 11:32:32 AM", Expr1026=1982, Key=1982, MANF=Yageo, MANF_PN=RC0402FR-071KL, MENG_PN=???1982, Modified By=jrowley, Other="1kOhm, 1%, 1/16W, Thick Film", P&V Description="Resistor, Thick Film, 1k Ohms, 0.063W, 1% Tol, 1kOhm, 1%, 1/16W, Thick Film, 0402, SMD", Parent Key=1982, SMD=True, Type="Thick Film", VENDOR=Digikey, VENDOR_PN=311-1.00KLRCT-ND, Verified=False
R24: library part 2070, Package=0402, Power=0.063, Tolerance=1, Approved=False, Class=Resistor, Date Modified="6/20/2019 8:44:42 PM", Expr1026=2070, Key=2070, MANF="Vishay Dale", MANF_PN=CRCW040210M0FKEDC, MENG_PN=???2070, Modified By=momo, P&V Description="Resistor, Thick Film, 10M Ohms, 0.063W, 1% Tol, 0402, SMD", Parent Key=2070, SMD=True, Type="Thick Film", VENDOR=Digikey, VENDOR_PN=541-4068-1-ND, Verified=False
R25: library part 2069, Package=0402, Power=0.063, Tolerance=1, Approved=False, Class=Resistor, Date Modified="6/20/2019 8:41:19 PM", Expr1026=2069, Key=2069, MANF="Vishay Dale", MANF_PN=CRCW0402680KJNED, MENG_PN=???2069, Modified By=momo, P&V Description="Resistor, Thick Film, 680k Ohms, 0.063W, 1% Tol, 0402, SMD", Parent Key=2069, SMD=True, Type="Thick Film", VENDOR=Digikey, VENDOR_PN=541-680KJCT-ND, Verified=False
R26: library part 2068, Package=0402, Power=0.2, Tolerance=1, Approved=False, Class=Resistor, Date Modified="6/20/2019 8:37:56 PM", Expr1026=2068, Key=2068, MANF="Vishay Dale", MANF_PN=CRCW0402330KFKEDHP, MENG_PN=???2068, Modified By=momo, P&V Description="Resistor, Thick Film, 330k Ohms, 0.2W, 1% Tol, 0402, SMD", Parent Key=2068, SMD=True, Type="Thick Film", VENDOR=Digikey, VENDOR_PN=541-330KYCT-ND, Verified=False
R27 R28: library part 2071, Package=0402, Power=0.063, Tolerance=1, Approved=False, Class=Resistor, Date Modified="6/20/2019 8:52:22 PM", Expr1026=2071, Key=2071, MANF="Vishay Dale", MANF_PN=CRCW040228K0FKED, MENG_PN=???2071, Modified By=momo, P&V Description="Resistor, Thick Film, 28k Ohms, 0.063W, 1% Tol, 0402, SMD", Parent Key=2071, SMD=True, Type="Thick Film", VENDOR=Digikey, VENDOR_PN=541-28.0KLCT-ND, Verified=False
U1: "Single ADC Pipelined 250Msps 8-bit Parallel/LVDS 44-Pin TQFP Tray", MANF="Analog Devices Inc.", MANF_PN=AD9481BSUZ-250, VENDOR=DigiKey, VENDOR_PN=AD9481BSUZ-250-ND
U2: library part MachXO2-4000, MANF="Lattice Semiconductor", MANF_PN=LCMXO2-4000HC-4MG132C, VENDOR=DigiKey, VENDOR_PN=220-1458-ND
U3: library part PIC32MZ2048EFH064-I/PT, "Microchip PIC32MZ EF Series 64-pin", MANF="Microchip Technology", MANF_PN=PIC32MZ2048EFH064-I/PT, VENDOR=DigiKey, VENDOR_PN=PIC32MZ2048EFH064-I/PT-ND
U4: library part S70KS, MANF=Cypress, MANF_PN=S70KS1281DPBHV020, VENDOR=DigiKey, VENDOR_PN=2015-S70KS1281DPBHV020-ND
U7: library part 2055, Package=4-SMD, Approved=False, Class=IC, Date Modified="6/13/2019 1:30:40 AM", Key=2055, MANF=Microchip, MANF_PN=DSC6011JI1A-024.0000, MENG_PN=???2055, Modified By=jrowley, Other="24MHz XO (Standard) CMOD Oscillator, 1.71-3.63V, Standby (Power Down)", P&V Description="IC, Oscillator, 24MHz XO (Standard) CMOD Oscillator, 1.71-3.63V, Standby (Power Down), 4-SMD, SMD", Parent Key=2055, SMD=True, Type=Oscillator, VENDOR=Digikey, VENDOR_PN=DSC6011JI1A-024.0000-ND, Verified=False
U8: library part 2056, Package=WDFN-8, Approved=False, Class=IC, Date Modified="6/13/2019 8:04:40 AM", Key=2056, MANF="On Semiconductor", MANF_PN=EMI2121MTTAG, MENG_PN=???2056, Modified By=jrowley, Other="USB Common-Mode Filter and ESD Protection", P&V Description="IC, Channel Protector, USB Common-Mode Filter and ESD Protection, WDFN-8, SMD", Parent Key=2056, SMD=True, Type="Channel Protector", VENDOR=Digikey, VENDOR_PN=EMI2121MTTAGOSCT-ND, Verified=False
U10 U12: library part 2108, Package=SOT-23-5, Approved=False, Class=IC, Date Modified="7/10/2019 7:11:20 PM", Key=2108, MANF=Microchip, MANF_PN=MCP6H01T-E/OT, MENG_PN=???2108, Modified By=momo, Other="3.5V to 16V", P&V Description="IC, Op Amp, 3.5V to 16V, SOT-23-5, SMD", Parent Key=2108, SMD=True, Type="Op Amp", VENDOR=Digikey, VENDOR_PN=MCP6H01T-E/OTCT-ND, Verified=False
U13: library part ADA4932, MANF="Analog Devices Inc.", MANF_PN=ADA4932-1YCPZ-R7, VENDOR=DigiKey, VENDOR_PN=ADA4932-1YCPZ-R7CT-ND
U5: MANF="Microchip Technology", MANF_PN=DSC1103CI3-250.0000, VENDOR=Mouser, VENDOR_PN=579-1103CI32500000
U6: MANF=Microchip, MANF_PN=MIC23050-SYML-TR, VENDOR=Digikey, VENDOR_PN=576-3351-1-ND
U9: MANF=Microchip, MANF_PN=MIC23050-GYML-TR, VENDOR=Digikey, VENDOR_PN=576-2974-1-ND
U11: MANF="Analog Devices Inc.", MANF_PN=AD8055ARTZ-REEL7, VENDOR=DigiKey, VENDOR_PN=AD8055ARTZ-REEL7CT-ND
U14: MANF="Analog Devices Inc.", MANF_PN=ADRF6518ACPZ-R7, VENDOR=DigiKey, VENDOR_PN=ADRF6518ACPZ-R7TR-ND
U15: MANF="Microchip Technology", MANF_PN=MCP4728T-E/UN, VENDOR=DigiKey, VENDOR_PN=MCP4728T-E/UNCT-ND
U16: MANF="Texas Instruments", MANF_PN=LM2664M6X/NOPB, VENDOR=DigiKey, VENDOR_PN=LM2664M6X/NOPBCT-ND

## Via types
v1: diameter 24, hole 12, Top Layer to Bottom Layer, tented both sides, 222 vias
v2: diameter 12, hole 6, Top Layer to Signal Layer 2, tented both sides, 88 vias
v3: diameter 12, hole 6, Top Layer to Signal Layer 1, tented both sides, 58 vias
v4: diameter 35, hole 19, Top Layer to Bottom Layer, tented both sides, 5 vias

## Nets (pads, with @x,y where several pads share a name; then routed paths per layer and width w, separated by ;. In a path a pad name is that pad's centre, name@x,y a point inside that pad or via, vN(x,y) a via of type N, cw(c..) or ccw(c..) an arc to the next point about the centre after c; other vN are vias at no path point)
1V8: C21.2 C22.2 C23.2 C29.2 C50.2 C51.2 C52.2 C53.2 C69.2 C70.2 L1.2 U2.D14 U2.H14 U2.L12 U4.B4 U4.D1 U4.E4 U9.4 | length 3353.1
  Top Layer w6: v1(1235,1145) 1259.17,1145 1259.84,1145.67 1281.1,1124.41 U2.D14@1281.1,1102.95 ; U4.D1@1388.74,1220.63 1388.74,1182.13 v1(1389.76,1181.1)
  Top Layer w8: C69.2@525,688.62 v1(525,725) ; v1(570,735) 570,701.5 U9.4@570.47,701.02 ; v1(675,595) L1.2@675,631.54 ; v1(750,595) C70.2@750,631.54 ; v1(1355,1135) 1359.84,1130.16 U2.H14@1359.84,1102.95 ; v1@1370,1035 1390.31,1035 v2(1418.9,1063.58)
  Signal Layer 1 w6: v2(1310,1338.74) 1310.16,1338.58 1451.42,1338.58 v1(1465,1325)
  Signal Layer 2 w25: v1(750,595) v1(675,595) 640,630 560,630 525,665 v1(525,725) 535,735 v1(570,735) 570,1170 780,1380 v1(910,1380) v1(935,1380) v1(960,1380) v1(985,1380) v1(1010,1380) v1(1035,1380)
  Power Layer w25: v1(910,1380) v1(935,1380) v1(960,1380) v1(985,1380) v1(1010,1380) v1(1035,1380) 1065,1410 1380,1410 v1(1465,1325) 1459.34,1325 1389.76,1255.43 v1(1389.76,1181.1) 1389.76,1169.76 v1(1355,1135) ; v1(1235,1145) 1345,1145 v1(1355,1135) ; v1(1369.76,1036.1) 1369.76,1120.24 v1(1355,1135)
  Bottom Layer w10: C51.2@1225,1186.38 1225,1155 v1(1235,1145) 1243.46,1145 C53.2@1275,1176.54 ; v1(1355,1135) 1358.62,1131.38 C50.2@1358.62,1105 ; C52.2@1358.62,1065 1358.62,1047.24 v1(1369.76,1036.1) ; v1(1389.76,1181.1) 1403.46,1194.8 C29.2@1403.46,1220 1393.62,1229.84 C22.2@1393.62,1265 ; C21.2@1393.62,1310 1450,1310 v1(1465,1325) 1440,1350 C23.2@1393.62,1350
  other v2: 1428.11,1338.74
3V3: C1.2 C2.2 C3.2 C4.2 C5.2 C6.2 C7.2 C8.2 C10.2 C11.2 C14.2 C15.2 C16.2 C17.2 C18.2 C19.2 C20.2 C25.2 C26.2 C27.2 C28.2 C30.2 C31.2 C32.2 C33.2 C34.2 C41.2 C42.2 C43.2 C44.2 C46.2 C47.2 C48.2 C49.2 C54.2 C55.2 C56.2 C57.2 C58.2 C59.2 C60.2 C61.2 C64.2 C71.2 L2.2 P1.2 R2.2 R3.2 R12.2 R13.2 R14.2 R16.2 R17.2 U1.3 U1.5 U1.18 U1.30 U1.31 U1.36 U1.41 U1.42 U1.43 U2.A1 U2.A8 U2.A14 U2.B10 U2.C5 U2.D3 U2.G1 U2.L1 U2.M6 U2.N1 U2.N11 U2.P1 U2.P14 U3.8 U3.19 U3.26 U3.34 U3.39 U3.54 U3.60 U5.1 U5.6 U6.4 U7.1 U7.4 U10.5 U14.1 U14.8 U14.12 U14.16 U14.25 U14.29 U14.32 | length 4345.7
  Top Layer w6: v1(275,1360) 276.38,1358.62 C10.2@310,1358.62 332.72,1381.34 U7.1@362.6,1381.34 U7.4@437.4,1381.34 ; v1(505,1150) 527.05,1127.95 U3.34@552.33,1127.95 ; U3.39@552.33,1029.53 589.53,1029.53 v1(600,1040) ; v1(715,735) 723.59,743.59 U3.54@723.59,779.53 ; v1(735,1265) 743.28,1256.72 U3.26@743.28,1220.47 ; v1(790,725) 800,715 C71.2@800,687.24 ; U3.60@841.7,779.53 841.7,743.3 v1(850,735) 845.47,730.47 U6.4@845.47,701.02 ; U3.19@881.07,1220.47 881.07,1246.07 v1(900,1265) ; v1(940,995) 944.84,990.16 U3.8@993.28,990.16 ; v1(950,595) L2.2@950,631.54 ; v1(1025,595) C25.2@1025,631.54 ; v1(1095,1190) R17.2@1095,1226.38 ; v1(1135,1190) R16.2@1135,1226.38 ; v1(1181.1,984.84) U2.A8@1222.05,984.84 ; v1(1195,820) U2.A1@1222.05,847.05 ; v1(1205,1120) 1205,1118.82 1221.46,1102.36 U2.A14@1222.05,1102.95 ; U2.C5@1261.42,925.79 1285,925.79 1285,905 1280,900 1280,887.52 U2.D3@1281.1,886.42 ; v1(1340.16,800) U2.G1@1340.16,847.05 ; v1@1415.33,959.67 1429.53,945.47 U2.M6@1438.58,945.47 ; U2.L1@1418.9,847.05 1418.9,816.54 1477.95,816.54 U2.P1@1477.95,847.05 ; v1(1458.27,816.54) U2.N1@1458.27,847.05 ; U2.P14@1477.95,1102.95 1477.95,1123.62 v1(1488.19,1133.86) ; v1(1530,1315) 1541.18,1326.18 U10.5@1562.6,1326.18 ; v1(1540,1150) R2.2@1576.38,1150 ; U1.18@1604,819 1626,819 v1(1655,790) ; v1(1740,1155) 1780.16,1155 U5.1@1783.66,1158.5 ; v1(1740,1220) 1782.17,1220 U5.6@1783.66,1221.5 ; v1(1855,1020) 1855,1035 1856,1036 U1.5@1856,1071 ; v1(1885,680) 1885,665 1888,662 U1.30@1888,629 ; U1.31@1919,629 1919,664 1920,665 v1(1920,680) ; U1.3@1919,1071 1919,1036 1925,1030 v1(1925,1020) ; v1(2010,1370) 2030,1370 2033.46,1366.54 U14.16@2051.1,1366.54 ; v1(2030,1185) 2031.54,1183.46 U14.25@2051.1,1183.46 ; U1.36@2046,756 2094,756 v1(2095,755) ; U1.41@2046,913 2083,913 2086,910 v1(2095,910) ; U1.42@2046,944 2084,944 2085,945 v1(2095,945) ; U1.43@2046,976 2084,976 2085,975 v1(2095,975) ; v1(2115,1405) 2129.84,1390.16 U14.12@2129.84,1366.54 ; U14.29@2129.84,1183.46 2129.84,1150.16 v1(2130,1150) ; U14.32@2188.9,1183.46 2192.36,1180 v1(2215,1180) 2215,1202.64 U14.1@2211.54,1206.1 ; U14.8@2211.54,1343.9 2233.9,1343.9 v1(2245,1355)
  Signal Layer 2 w6: v2(1241.73,1024.21) 1280.79,1024.21 1303.56,1001.44 1305,1002.87 v1(1305,1000) ; v2(1458.27,1043.9) 1488.9,1043.9 1505,1060 v1(1525,1060)
  Bottom Layer w6: v1(1315,620) 1310,620 R13.2@1351.38,620 ; R14.2@1398.62,730 1455,730 v1@1475,750 ; R12.2@1498.62,620 1540,620 v1(1535,620)
  Bottom Layer w10: v1(505,1150) 538.62,1150 C18.2@545,1143.62 ; v1(600,1040) 631.38,1040 C19.2@640,1048.62 ; v1(715,735) C16.2@715,776.38 ; C14.2@726.38,1225 735,1233.62 v1(735,1265) ; C30.2@780,766.54 780,735 v1(790,725) ; P1.2@848.62,1325.59 R3.2@848.62,1380 ; v1(850,735) C15.2@850,776.38 ; C20.2@900,1003.62 908.62,995 v1(940,995) ; v1(900,1265) 900,1232.24 C17.2@907.24,1225 ; v1(1181.1,984.84) 1213.31,984.84 C57.2@1215,986.54 ; v1(1195,820) 1215,840 1248.62,840 C48.2@1255,846.38 ; v1(1205,1120) 1265,1060 C61.2@1265,1053.46 ; C56.2@1295,846.38 C60.2@1335,846.38 1340.16,841.22 v1(1340.16,800) ; v1(1305,1000) 1308.62,1003.62 C59.2@1335,1003.62 C43.2@1375,1003.62 ; C41.2@1375,846.38 C44.2@1415,846.38 v1(1415,800) ; v1(1410,965) 1410,968.62 C55.2@1445,1003.62 C58.2@1485,1003.62 ; C49.2@1410,1051.54 1437.91,1051.54 C54.2@1485,1098.62 ; v1(1458.27,816.54) 1458.27,843.11 C42.2@1455,846.38 C46.2@1495,846.38 ; v1(1488.19,1133.86) 1485,1130.67 C54.2@1485,1098.62 ; v1(1525,1060) 1523.62,1060 C54.2@1485,1098.62 ; C64.2@1530,1273.62 v1(1530,1315) ; v1(1655,790) 1671.54,806.54 C28.2@1700,806.54 ; v1(1740,1155) 1770,1125 C8.2@1776.38,1125 ; C1.2@1858.62,980 v1@1858.62,1016.38 ; C7.2@1878.62,720 1885,713.62 v1(1885,680) ; v1(1920,680) 1920,713.62 C4.2@1926.38,720 ; v1(1925,1020) 1935,1020 1953.62,1001.38 C5.2@1953.62,980 ; v1(2010,1370) 2025,1355 C11.2@2025,1333.62 ; v1(2030,1185) 2031.38,1183.62 C34.2@2031.38,1145 ; C27.2@2050,903.46 2088.46,903.46 v1(2095,910) ; C2.2@2053.62,945 v1(2095,945) ; C3.2@2053.62,985 2085,985 v1(2095,975) ; C6.2@2055,758.62 2058.62,755 v1(2095,755) ; v1(2115,1405) 2130,1390 C26.2@2156.38,1390 ; v1(2130,1150) 2135,1145 C31.2@2171.38,1145 ; v1(2215,1180) 2226.38,1168.62 C33.2@2265,1168.62 ; v1(2245,1355) 2261.38,1371.38 C32.2@2261.38,1390
  other v1: 1475.16,750 1285,925
5V: C36.2 C37.2 C40.2 C45.2 C62.2 C63.2 L3.2 R18.1 U11.5 U12.5 U13.5 U13.6 U13.7 U13.8 U13.12 U15.1 U16.4 U16.5 | length 4318
  Top Layer w3: v1@1809.37,1364.37 v1(1810,1365)
  Top Layer w6: v1(2115,1110) 2122.83,1102.17 U13.12@2145.47,1102.17 ; U13.5@2227.17,1020.47 2255.47,1020.47 v1(2265,1030) 2254.84,1040.16 U13.6@2227.17,1040.16 ; U13.7@2227.17,1059.84 2254.84,1059.84 v1(2265,1070) 2255.47,1079.53 U13.8@2227.17,1079.53 ; v1(2300,1085) 2312.6,1072.4 U11.5@2312.6,1048.23 ; R18.1@2315,1313.62 v1(2315,1345) ; U12.5@2427.4,1208.82 2458.82,1208.82 v1(2460,1210) ; U16.4@2634.13,1207.6 2672.6,1207.6 v1(2675,1210) ; U16.5@2634.13,1245 v1(2675,1245)
  Top Layer w10: L3.2@1100,624.57 1100.43,625 v1(1145,625) ; U15.1@1767.32,1364.37 v1@1809.37,1364.37
  Signal Layer 1 w25: v1(1810,1365) 1810,1290 1950,1150 2090,1150 2115,1125 v1(2115,1110)
  Power Layer w25: v1(2115,1110) 2225,1110 v1(2265,1070) ; v1(2265,1030) v1(2265,1070) ; v1(2345,1060) 2325,1060 v1(2300,1085) ; 2360,1225 2375,1210 ; v1@2459.5,1210 v1(2410,1210) 2375,1210 ; v1(2675,1210) v1(2675,1245) 2590,1245 2445,1390 2335,1390 2315,1370 v1(2315,1345) 2315,1270 2375,1210 ; v1(2265,1070) 2285,1070 v1(2300,1085) ; v1(2300,1085) 2375,1160 2375,1210
  Power Layer w30: v1(1145,625) 1180,590 2265,590 2500,825 2500,1155 2590,1245
  Bottom Layer w10: C37.2@2215,1083.46 2251.54,1083.46 v1(2265,1070) ; C36.2@2265,993.62 v1(2265,1030) ; v1(2300,1085) 2325,1110 C45.2@2351.38,1110 ; v1(2410,1210) 2413.62,1206.38 C40.2@2413.62,1165 ; C62.2@2423.46,1215 2455,1215 v1(2460,1210)
5V_USB: C12.2 C13.2 L3.1 P3.1 U3.33 U6.2 U6.7 U9.2 U9.7 | length 2302.1
  Top Layer w6: v1(530,1180) 552.33,1157.67 U3.33@552.33,1147.64 ; U9.7@609.84,628.98 609.84,595.16 v1(610,595) ; U9.2@609.84,701.02 609.84,734.84 v1(610,735) ; U6.7@884.84,628.98 884.84,595.16 v1(885,595) ; U6.2@884.84,701.02 885,701.18 v1(885,735)
  Top Layer w10: P3.1@305,1051.18 321.18,1051.18 365,1095 v4(365,1100) ; v1(420,1110) 420,1120 C12.2@420,1146.38 ; v1(460,1110) 460,1120 C13.2@460,1146.38 ; L3.1@1100,695.43 1105.43,690 v1(1145,690)
  Signal Layer 1 w25: v1(530,1180) 485,1180 460,1155 v1(460,1110) v1(420,1110) 375,1110 v4(365,1100) 255,990 255,685 285,655 530,655 ; v1(610,595) 610,630 ; v1(610,735) 530,655 ; v1(885,595) 885,630 ; v1(885,735) 910,710 910,630 ; v1(1145,690) 1085,630 910,630 ; 530,655 555,630 610,630 ; 610,630 885,630 ; 885,630 910,630
-5V: C38.2 C39.2 C65.2 C66.2 C67.2 C68.2 C72.2 U11.2 U12.2 U13.13 U13.14 U13.15 U13.16 U16.2 | length 1420.8
  Top Layer w6: U13.16@2122.83,1020.47 2104.53,1020.47 v1(2085,1040) 2100,1040 2100.16,1040.16 U13.15@2122.83,1040.16 ; U13.14@2122.83,1059.84 2105.16,1059.84 v1(2085,1080) 2100,1080 2100.47,1079.53 U13.13@2122.83,1079.53 ; v1(2340,915) 2350,925 U11.2@2350,951.77 ; U12.2@2390,1311.18 v1(2390,1350) ; v1(2485,1245) U16.2@2525.87,1245
  Power Layer w25: v1(2085,1080) v1(2085,1040) 2130,995 2331.54,995 v1@2340,1003.46 ; v1(2340,915) v1@2340,1003.46 ; v1(2390,1350) 2390,1320 v1(2440,1270) 2457.5,1252.5 2477.5,1252.5 v1(2485,1245) 2487.5,1242.5 2487.5,1192.5 2460,1165 2430,1165 2390,1125 2390,1053.46 v1(2341.54,1005) v1@2340,1003.46
  Bottom Layer w10: v1(2085,1080) 2113.62,1080 C38.2@2120,1073.62 2129.84,1083.46 C39.2@2165,1083.46 ; v1(2340,915) 2351.38,926.38 C66.2@2351.38,955 ; v1(2390,1350) 2390,1343.62 C65.2@2413.62,1320 ; C67.2@2423.46,1270 v1(2440,1270) ; v1(2485,1245) C72.2@2546.54,1245
\M\C\L\R: P1.1 R3.1 U3.9 | length 580.8
  Top Layer w8: P1.1@800,1325 840,1285 920,1285 945,1260 945,1155 899.84,1109.84 899.84,1025.16 910,1015 955,1015 960.16,1009.84 U3.9@993.28,1009.84
  Bottom Layer w8: P1.1@800,1325 800,1378.62 R3.1@801.38,1380
\P\M\W\R: U2.J2 U3.53 | length 922.9
  Top Layer w6: U3.53@703.91,779.53 703.91,853.91 v3(705,855)
  Signal Layer 1 w6: v3(705,855) 795,765 1080,765 1120,725 1340,725 1379.53,764.53 v3(1379.53,866.73)
ADC_D0A: U1.14 U2.N3 | length 350.9
  Top Layer w3: U1.14@1604,944 1649,944 v2(1650,945)
  Signal Layer 2 w3: v2(1458.27,886.42) 1529.69,815 1570,815 1650,895 v2(1650,945)
ADC_D0B: U1.19 U2.P4 | length 487.5
  Top Layer w3: U2.P4@1477.95,906.1 1490,894.06 1490,800 1495,795 1500,795 1505,800 1505,895 1510,900 1515,900 1520,895 1520,760 1525,755 1530,755 1535,760 1535,775 1547,787 U1.19@1604,787
ADC_D1A: U1.13 U2.N5 | length 354.7
  Top Layer w3: U1.13@1604,976 1639,976 v2(1640,975)
  Signal Layer 2 w3: v2(1458.27,925.79) 1549.06,835 1570,835 1595,860 1595,930 v2(1640,975)
ADC_D1B: U1.20 U2.M5 | length 418.5
  Top Layer w3: v2(1560,755) 1561,756 U1.20@1604,756
  Signal Layer 1 w3: v3(1438.58,925.79) 1425,912.2 1425,890 1490,825 1490,780 1495,775 1500,775 1505,780 1505,810 1510,815 1515,815 1520,810 1520,765 1525,760 1530,760 1535,765 1535,780 1540,785 1545,785 1550,780 1550,765 v2(1560,755)
ADC_D2A: U1.12 U2.P7 | length 494.4
  Top Layer w3: U2.P7@1477.95,965.16 1525.16,965.16 1567,1007 1567,1067 1575,1075 1645,1075 1650,1070 1650,1060 1645,1055 1580,1055 1575,1050 1575,1040 1580,1035 1640,1035 1650,1025 1650,1015 1642,1007 U1.12@1604,1007
ADC_D2B: U1.21 U2.N7 | length 426.9
  Top Layer w3: v2(1560,725) 1561,724 U1.21@1604,724
  Signal Layer 1 w3: v2(1458.27,965.16) 1475,948.43 1475,880 1620,735 1620,720 1610,710 1575,710 v2(1560,725)
ADC_D3A: U1.11 U2.P8 | length 473.8
  Top Layer w3: U2.P8@1477.95,984.84 1529.84,984.84 1555,1010 1555,1080 1540,1095 1515,1095 1510,1100 1510,1110 1515,1115 1570,1115 1575,1110 1575,1100 1580,1095 1585,1095 1590,1100 1590,1110 1595,1115 1600,1115 1605,1110 1605,1100 1610,1095 1615,1095 1620,1100 1620,1110 1625,1115 1655,1115 1668,1102 U1.11@1668,1071
ADC_D3B: U1.22 U2.M8 | length 405.2
  Top Layer w3: v2(1560,695) 1562,693 U1.22@1604,693
  Signal Layer 1 w3: v3@1440,985 1440,945 1415,920 1415,890 1480,825 1480,775 v2(1560,695)
  other v3: 1438.58,984.84
ADC_D4A: U1.10 U2.P9 | length 457.8
  Top Layer w3: U2.P9@1477.95,1004.53 1534.53,1004.53 1545,1015 1545,1075 1535,1085 1505,1085 1495,1095 1495,1115 1505,1125 1675,1125 1699,1101 U1.10@1699,1071
ADC_D4B: U1.23 U2.N9 | length 462.4
  Top Layer w3: U1.23@1668,629 v3(1668,675)
  Signal Layer 1 w3: v3(1458.27,1004.53) 1485,977.8 1485,885 1668,702 v3(1668,675)
ADC_D5A: U1.9 U2.M9 | length 350.1
  Top Layer w3: v2(1730,1025) 1731,1026 U1.9@1731,1071
  Signal Layer 2 w3: v2(1438.58,1004.53) 1443.11,1000 1705,1000 v2(1730,1025)
ADC_D5B: U1.24 U2.N10 | length 494.9
  Top Layer w3: U1.24@1699,629 v3(1699,675)
  Signal Layer 1 w3: v3(1458.27,1024.21) 1699,783.48 v3(1699,675)
ADC_D6A: U1.8 U2.M10 | length 392.8
  Top Layer w3: v2(1760,1025) 1762,1027 U1.8@1762,1071
  Signal Layer 2 w3: v2(1438.58,1024.21) 1489.21,1024.21 1503.43,1010 1685,1010 1715,1040 1745,1040 v2(1760,1025)
ADC_D6B: U1.25 U2.P11 | length 519.7
  Top Layer w3: U1.25@1731,629 v3(1731,675)
  Signal Layer 1 w3: v3(1477.95,1043.9) 1477.95,1027.05 1731,774 v3(1731,675)
ADC_D7A: U1.7 U2.M11 | length 440.6
  Top Layer w3: U1.7@1794,1071 1794,1026 v2(1795,1025)
  Signal Layer 2 w3: v2(1438.58,1043.9) 1474.69,1080 1550,1080 1580,1050 1770,1050 v2(1795,1025)
ADC_D7B: U1.26 U2.P12 | length 552.2
  Top Layer w3: U1.26@1762,629 v3(1762,675)
  Signal Layer 1 w3: v3(1477.95,1063.58) 1490,1051.54 1490,1040 1762,768 v3(1762,675)
ADC_DCO_N: U1.16 U2.P6 | length 440.7
  Top Layer w3: U2.P6@1477.95,945.47 1514.53,945.47 1530,930 1530,850 1535,845 1540,845 1545,850 1545,930 1530,945 1530,955 1535,960 1545,960 1555,950 1555,870 1560,865 1565,865 1570,870 1570,875 1575,880 1603,880 U1.16@1604,881